# Altium PCB comms_ERC.PcbDoc
Units mm, origin at the board's own origin, x right, y up, seen from the top; angles counter-clockwise.
Board outline 61 x 102 mm, 2 copper layers (Top Layer, Bottom Layer); 5 components, 9 nets, 63 pads, 0 vias.
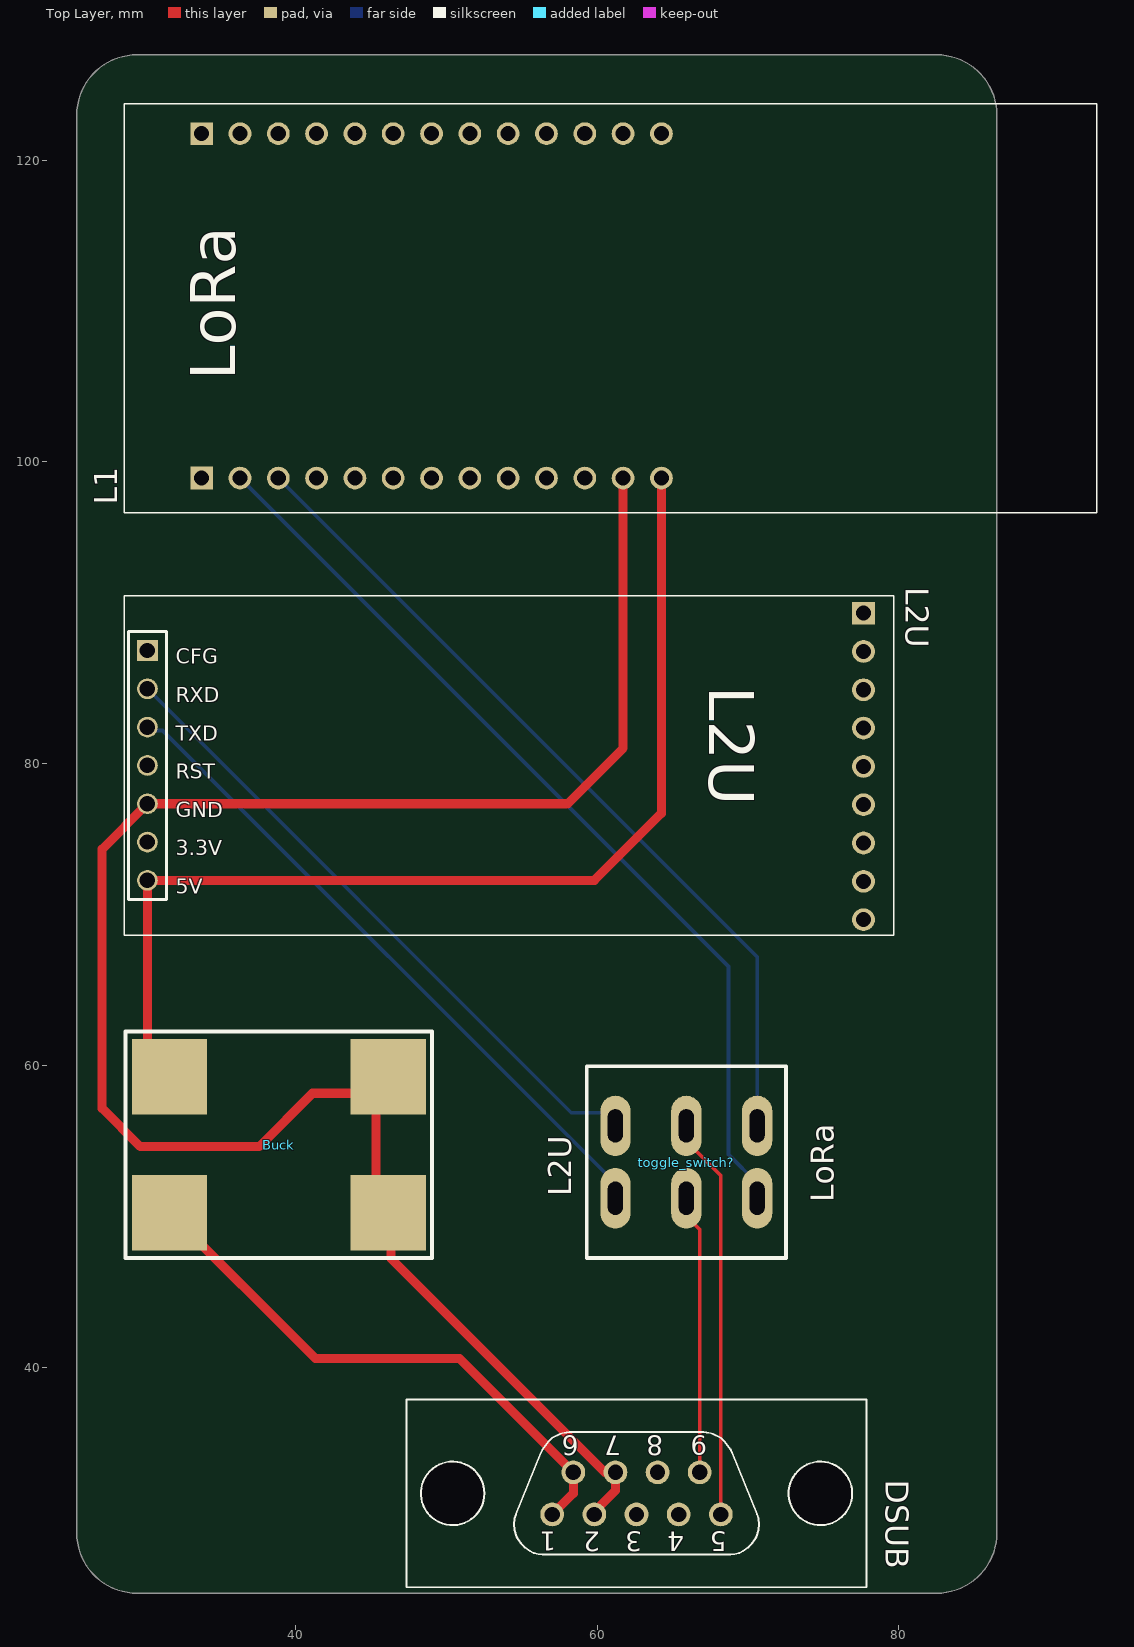
[diagram p0: Top Layer view]
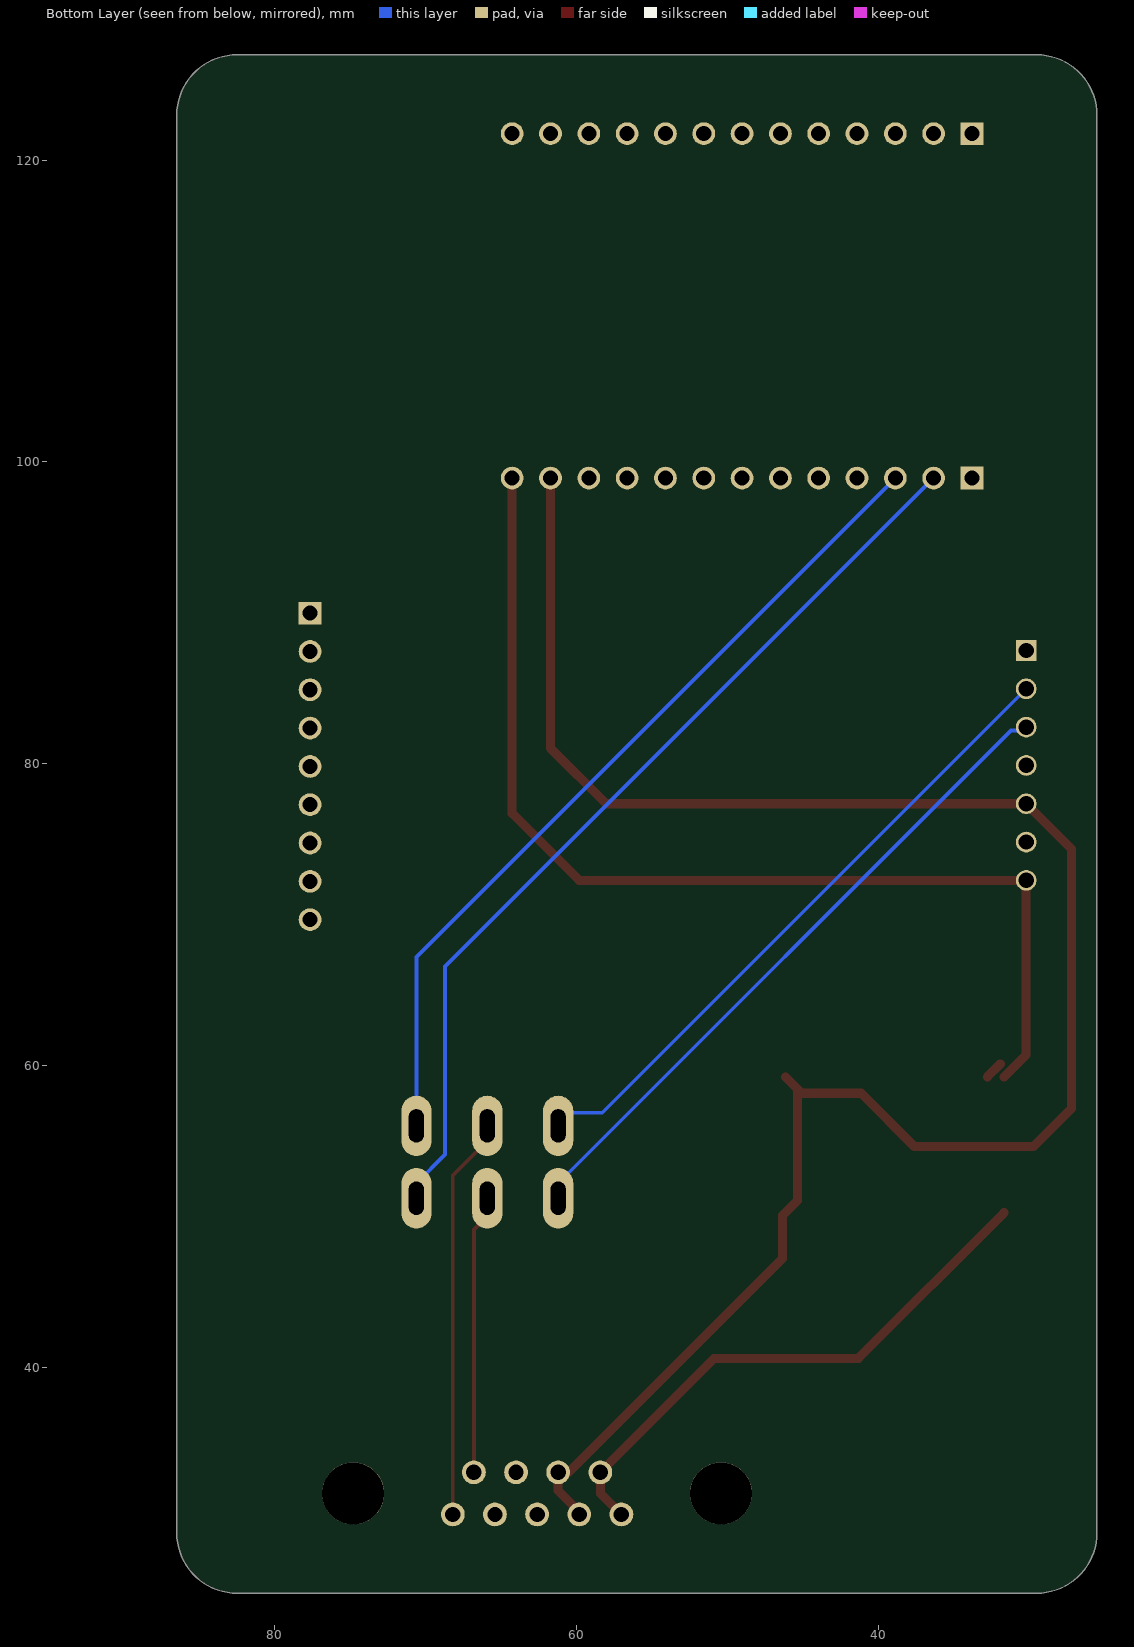
[diagram p1: Bottom Layer view, seen from below]

## Layer stack, top to bottom
Top Solder: solder mask 0.0102, Solder Resist, Dk 3.5
Top Layer: signal copper 0.0356
Dielectric 1: dielectric 0.32, FR-4, Dk 4.8
Bottom Layer: signal copper 0.0356
Bottom Solder: solder mask 0.0102, Solder Resist, Dk 3.5

## Board outline
25.5,29 25.5,123 cw(c29.5,123) 29.5,127 82.5,127 cw(c82.5,123) 86.5,123 86.5,29 cw(c82.5,29) 82.5,25 29.5,25 cw(c29.5,29)

## Design rules (kind name [scope] priority, off if disabled: settings)
Clearance [All] p1: gap=0.254 ignorepadtopadclearanceinfootprint=FALSE
PolygonConnect [All] p1: connectstyle=Relief reliefconductorwidth=0.254 reliefentries=4 polygonreliefangle="90 Angle" airgapwidth=0.254
RoutingVias [All] p1: holewidth=0.711 width=1.27 viastyle="Through Hole" minholewidth=0.711 minwidth=1.27 maxholewidth=0.711 maxwidth=1.27
SolderMaskExpansion [All] p1: expansion=0.102 istentingtop=FALSE
Width [All] p1: maxlimit=1 minlimit=0.254 preferedwidth=0.254 minimp=50.000000 maximp=50.000000 favimp=50.000000
30 further rules are at their usual default settings.

## Components (designator, comment, footprint, x,y, rotation, side; value= is the part's Value field where it differs from the comment)
Buck "microbuck" "Micro buck" 38.899,54.737 r90 top
DSUB "DB9F" D-09F 62.611,31.623 r180 top
L1 "LORA" PCBComponent_1#1 54.824,108.331 r0 top
L2U "Component_1" PCBComponent_1#2 56.321,81.153 r0 top
toggle_switch? "toggle switch" "toggle switch" 65.912,53.587 r90 top

## Footprints (in the part's own frame and the unit in brackets; to place one, negate y for a bottom-side part, rotate by r counter-clockwise, add the part's x,y. Pads: shape width x height; smd on the part's side, far side on the other; paste and mask are expansions set on the pad)
D-09F [mil]
  round 62 hole 40: 1(220,55) 2(110,55) 3(0,55) 4(-110,55) 5(-220,55) 6(165,-55) 7(55,-55) 8(-55,-55) 9(-165,-55)
  round 162 hole 162 unplated: ""(-480,0) ""(480,0)
  silkscreen extent -600,-245 600,245
"Micro buck" [mm]
  rect 5x5 smd: 1(-4.5,7.25) 2(4.5,7.25) 3(-4.5,-7.25) 4(4.5,-7.25)
  silkscreen extent -7.5,-10.16 7.5,10.16
PCBComponent_1#1 [mm]
  rect 1.508x1.508 hole 1: 1(-21.042,-9.398) 14(-21.042,13.436)
  round 1.508 hole 1: 2(-18.502,-9.398) 3(-15.962,-9.398) 4(-13.422,-9.398) 5(-10.882,-9.398) 6(-8.342,-9.398) 7(-5.802,-9.398) 8(-3.262,-9.398) 9(-0.722,-9.398) 10(1.818,-9.398) 11(4.358,-9.398) 12(6.898,-9.398) 13(9.438,-9.398) 15(-18.502,13.436) 16(-15.962,13.436) 17(-13.422,13.436) 18(-10.882,13.436) 19(-8.342,13.436) 20(-5.802,13.436) 21(-3.262,13.436) 22(-0.722,13.436) 23(1.818,13.436) 24(4.358,13.436) 25(6.898,13.436) 26(9.438,13.436)
  silkscreen extent -26.16,-11.71 38.31,15.42
PCBComponent_1#2 [mm]
  rect 1.37x1.37 hole 1.02: 1(-26.135,6.35)
  round 1.37 hole 1.02: 2(-26.135,3.81) 3(-26.135,1.27) 4(-26.135,-1.27) 5(-26.135,-3.81) 6(-26.135,-6.35) 7(-26.135,-8.89)
  rect 1.508x1.508 hole 1: 11(21.341,8.826)
  round 1.508 hole 1: 12(21.341,6.286) 13(21.341,3.746) 14(21.341,1.206) 15(21.341,-1.334) 16(21.341,-3.874) 17(21.341,-6.414) 18(21.341,-8.954) 19(21.341,-11.494)
  silkscreen extent -27.66,-12.52 23.34,9.98
"toggle switch" [mm]
  oval 4x2 hole 1 slot 2.2 at 0 deg: 1(-2.4,4.7) 2(-2.4,0) 3(-2.4,-4.7) 4(2.4,4.7) 5(2.4,0) 6(2.4,-4.7)
  silkscreen extent -6.35,-6.6 6.35,6.6

## Part data
DSUB: "Adapter Connector D-Sub, 9 Pin Female To Modular, Female Jack, 8p8c _RJ45_ Beige", Package=None, Availability=Unavailable, MF="Assmann WSW", MP=DB9F, Price=None, SnapEDA_Link=https://www.snapeda.com/parts/DB9F/Assmann%20WSW%20Components/view-part/558712/?ref=snap
L2U: "L2T"

## Nets (pads, with @x,y where several pads share a name; then routed paths per layer and width w, separated by ;. In a path a pad name is that pad's centre, name@x,y a point inside that pad or via, vN(x,y) a via of type N, cw(c..) or ccw(c..) an arc to the next point about the centre after c; other vN are vias at no path point)
NetBuck_1: Buck.1 DSUB.1 DSUB.6 | length 37.3
  Top Layer w0.6: Buck.1 41.318,40.568 50.872,40.568 DSUB.6 58.42,31.623 DSUB.1
NetBuck_2: Buck.2 L1.13 L2U.7 | length 73
  Top Layer w0.6: Buck.2 30.186,60.7 L2U.7 59.817,72.263 64.262,76.708 L1.13 ; Buck.2@31.904,60.088 Buck.2@32.755,59.237
NetBuck_3: Buck.3 Buck.4 DSUB.2 DSUB.7 L1.12 L2U.5 | length 129.9
  Top Layer w0.6: Buck.4 Buck.4@45.354,58.442 ; DSUB.2 59.817,30.401 61.214,31.798 DSUB.7 DSUB.7@60.703,33.02 ; DSUB.7@60.515,33.022 46.348,47.188 46.348,50.038 45.354,51.032 Buck.4@45.354,58.442 ; L1.12 61.722,81.026 58.039,77.343 L2U.5 27.178,74.335 27.178,57.15 29.718,54.61 37.592,54.61 41.131,58.149 45.061,58.149 Buck.4@45.354,58.442
NetDSUB_5: DSUB.5 toggle_switch?.5 | length 27
  Top Layer w0.254: toggle_switch?.5 65.912,54.987 68.199,52.7 DSUB.5
  Bottom Layer w0.254: DSUB.5@67.944,30.226 DSUB.5
NetDSUB_9: DSUB.9 toggle_switch?.2 | length 18.5
  Top Layer w0.254: toggle_switch?.2 65.912,50.014 66.802,49.124 DSUB.9
NetL1_2: L1.2 toggle_switch?.3 | length 61.9
  Bottom Layer w0.254: L1.2 68.707,66.548 68.707,54.092 70.612,52.187 toggle_switch?.3
NetL1_3: L1.3 toggle_switch?.6 | length 56.1
  Bottom Layer w0.254: L1.3 70.612,67.183 toggle_switch?.6
NetL2U_2: L2U.2 toggle_switch?.4 | length 43.1
  Bottom Layer w0.254: L2U.2 58.289,56.86 60.405,56.86 61.212,56.053 toggle_switch?.4
NetL2U_3: L2U.3 toggle_switch?.1 | length 44.6
  Bottom Layer w0.254: L2U.3 30.4,82.209 31.19,82.209 61.212,52.187 toggle_switch?.1
pads on no net: DSUB. DSUB.3 DSUB.4 DSUB.8 L1.1 L1.4 L1.5 L1.6 L1.7 L1.8 L1.9 L1.10 L1.11 L1.14 L1.15 L1.16 L1.17 L1.18 L1.19 L1.20 L1.21 L1.22 L1.23 L1.24 L1.25 L1.26 L2U.1 L2U.4 L2U.6 L2U.11 L2U.12 L2U.13 L2U.14 L2U.15 L2U.16 L2U.17 L2U.18 L2U.19

## Silkscreen, mask and mechanical layers (free items; w line width, h text height)
Top Overlay:
  text "L2U" at 58.293,51.308 h1.52 r90
  text "LoRa" at 75.692,50.927 h1.52 r90

## Text inside footprints (layer, text, board x,y; h text height)
DSUB: Top Overlay "1" at 57.276,29.083 h1.27 r180; Top Overlay "2" at 60.194,29.079 h1.27 r180; Top Overlay "3" at 62.992,29.08 h1.27 r180; Top Overlay "4" at 65.791,29.079 h1.27 r180; Top Overlay "5" at 68.585,29.081 h1.27 r180; Top Overlay "6" at 58.798,35.436 h1.27 r180; Top Overlay "7" at 61.594,35.435 h1.27 r180; Top Overlay "8" at 64.391,35.436 h1.27 r180; Top Overlay "9" at 67.31,35.433 h1.27 r180
L1: Top Overlay "LoRa" at 36.009,105.429 h3 r90
L2U: Top Overlay "5V" at 32.064,71.374 h1; Top Overlay "3.3V" at 32.064,73.914 h1; Top Overlay "GND" at 32.064,76.454 h1; Top Overlay "RST" at 32.064,78.994 h1; Top Overlay "TXD" at 32.064,81.534 h1; Top Overlay "RXD" at 32.064,84.074 h1; Top Overlay "CFG" at 32.064,86.614 h1